# Altium PCB dd_2020-05-13_13-12-45.pcbdoc
Units mil, origin at the board's own origin, x right, y up, seen from the top; angles counter-clockwise.
Board outline 4340 x 2925 mil, 2 copper layers (Top Layer, Bottom Layer); 27 components, 65 nets, 173 pads, 61 vias.
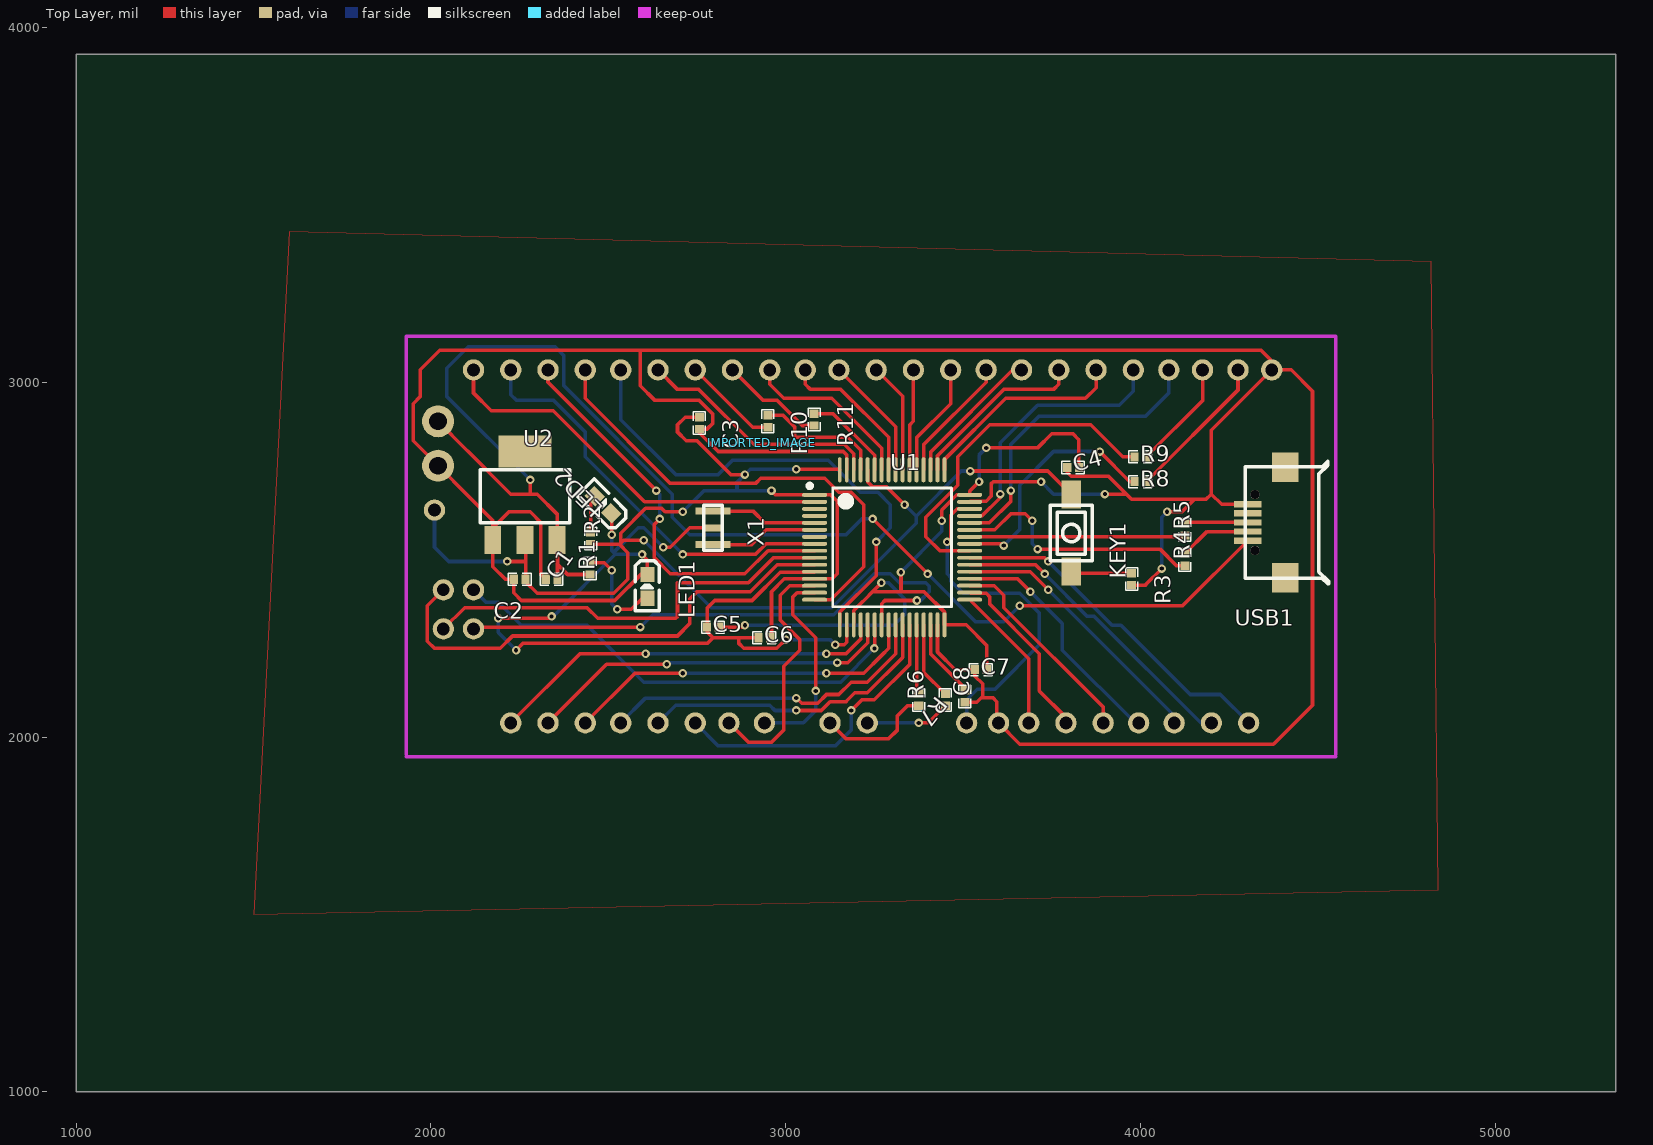
[diagram p0: Top Layer view]
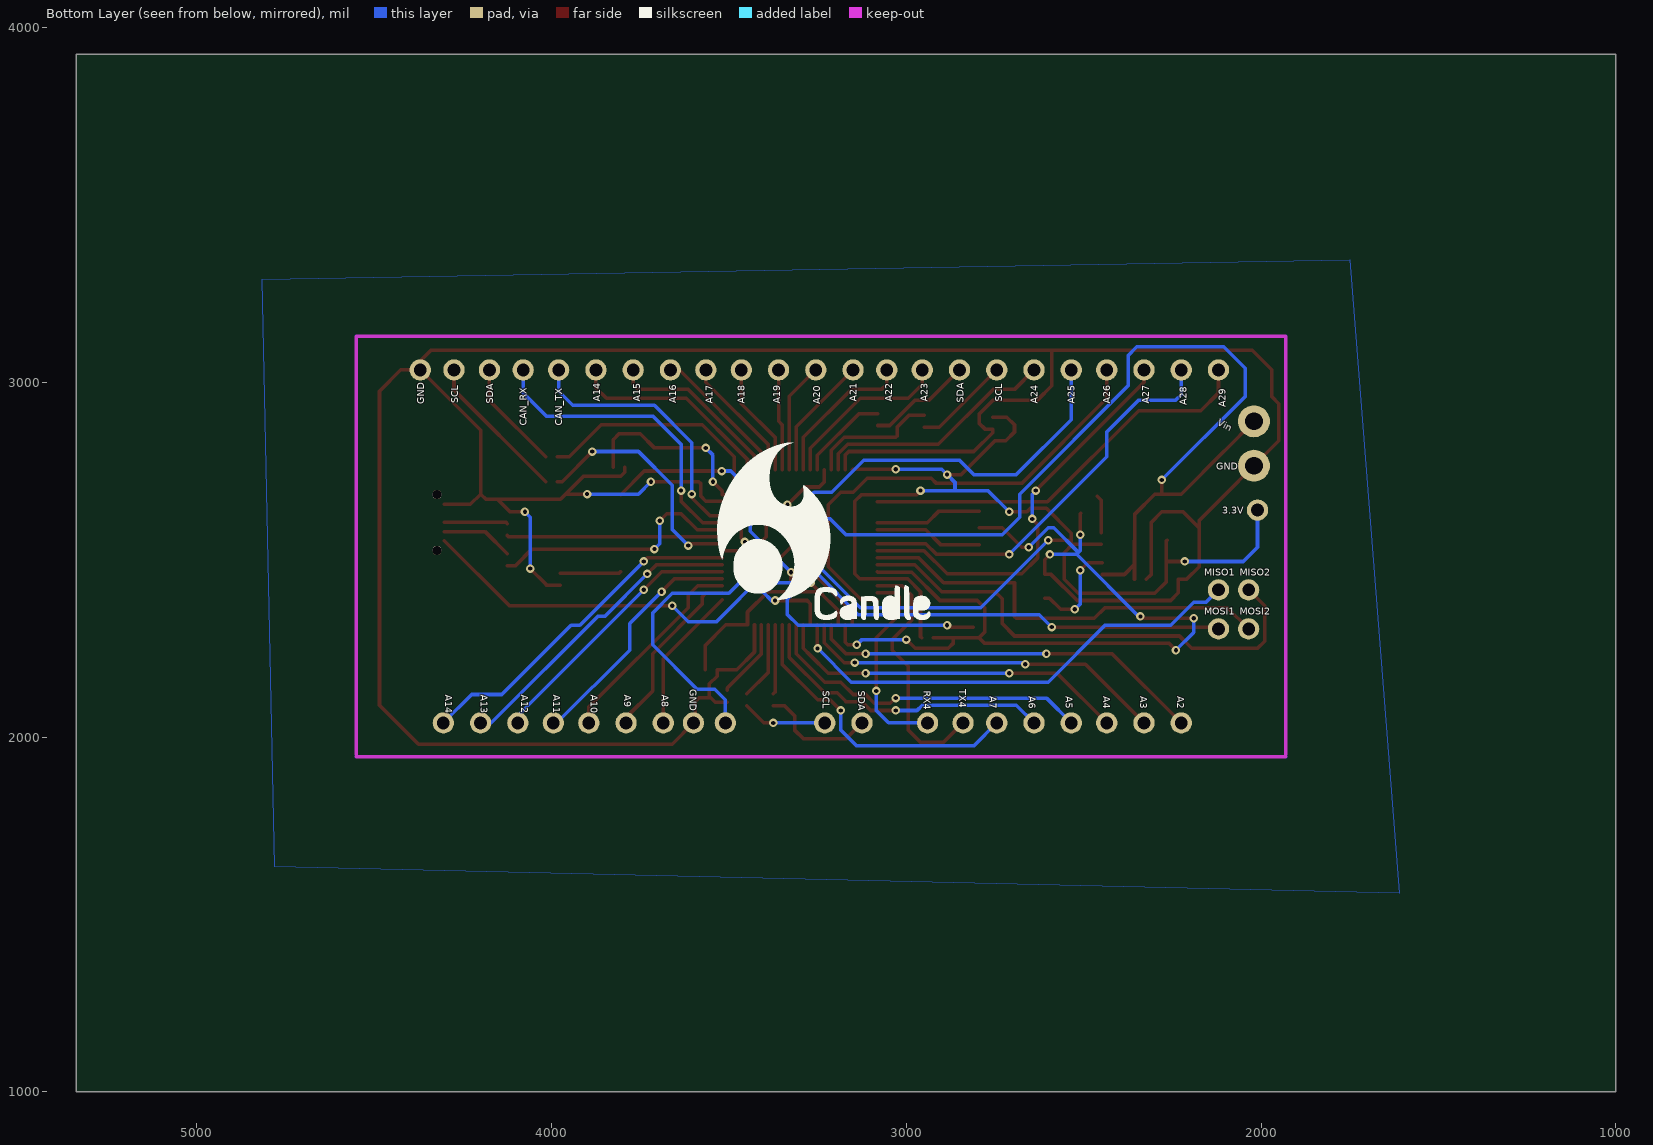
[diagram p1: Bottom Layer view, seen from below]

## Layer stack, top to bottom
Top Layer: signal copper (thickness not stored)
Dielectric: dielectric 12.6, FR-4, Dk 4.8
Bottom Layer: signal copper (thickness not stored)

## Board outline
5340,1000 1000,1000 1000,3925 5340,3925

## Components (designator, comment, footprint, x,y, rotation, side; value= is the part's Value field where it differs from the comment)
C1 "10uF" 0402 2340,2445 r0 top
C2 "10uF" 0402 2250,2445 r180 top
C3 "100nF" 0402 2756.7,2885 r270 top
C4 "100nF" 0402 3810,2760 r0 top
C5 "100nF" 0402 2795,2310 r0 top
C6 "100nF" 0402 2940,2280 r0 top
C7 "100nF" 0402 3550,2190 r0 top
C8 "4.7uF" 0402 3505,2115 r90 top
IMPORTED_IMAGE "IMPORTED_IMAGE" IMPORTED_IMAGE 2932.67,2830.16 r0 top
KEY1 "Switch3x4x2" KEY-3.0*4.0 3805,2575 r270 top
LED1 "19-213/Y2C-CQ2R2L/3T(CY)" LED-0603 2610,2425 r270 top
LED2 "19-213/Y2C-CQ2R2L/3T(CY)" LED-0603 2485,2655 r135 top
R1 "1k" 0402 2448.3,2475 r270 top
R2 "1k" 0402 2450,2560 r90 top
R3 "1k" 0402 3975,2445 r270 top
R4 "22" 0402 4125,2500 r90 top
R5 "22" 0402 4125,2585 r90 top
R6 "1k" 0402 3375,2105 r90 top
R7 "1k" 0402 3450,2105 r90 top
R8 "10k" 0402 4000,2720 r0 top
R9 "10k" 0402 4000,2790 r0 top
R10 "10k" 0402 2950,2890 r270 top
R11 "10k" 0402 3080,2895 r270 top
U1 "STM32F722RET6" LQFP-64_10X10X05P 3300,2535 r0 top
U2 "NCP1117ST33T3G" SOT-223_4PIN_L6.30-W7.30-PITCH4.60-BL 2265,2680 r0 top
USB1 "Micro USB-B 5P_C40942" MICRO-USB-12 4355,2605 r180 top
X1 "16MHz" 3213 2795,2590 r270 top

## Footprints (in the part's own frame and the unit in brackets; to place one, negate y for a bottom-side part, rotate by r counter-clockwise, add the part's x,y. Pads: shape width x height; smd on the part's side, far side on the other; paste and mask are expansions set on the pad)
0402 [mil]
  rect 23.62x25.58 smd: 1(-16.7,0) 2(16.7,0)
  silkscreen extent -32,-17 32,17
3213 [mil]
  rect 19.68x98.42 smd: 1(-47.2,0) 3(47.2,0)
  rect 19.68x63 smd: 2(0,0)
  silkscreen extent -63,-26 63,26
IMPORTED_IMAGE [mil]
KEY-3.0*4.0 [mm]
  rect 2x1.4 smd: 1(-2.752,0.001) 2(2.752,-0.001)
  silkscreen extent -2.01,-1.5 1.99,1.5
LED-0603 [mil]
  rect 43x39 smd: 1(33.5,0) 2(-33.5,0)
  silkscreen extent -72,-34 70,34
LQFP-64_10X10X05P [mil]
  oval 70.7x11.02 smd: 1(-218.5,147.64) 2(-218.5,127.95) 3(-218.5,108.27) 4(-218.5,88.58) 5(-218.5,68.9) 6(-218.5,49.21) 7(-218.5,29.53) 8(-218.5,9.84) 9(-218.5,-9.84) 10(-218.5,-29.53) 11(-218.5,-49.21) 12(-218.5,-68.9) 13(-218.5,-88.58) 14(-218.5,-108.27) 15(-218.5,-127.95) 16(-218.5,-147.64) 33(218.5,-147.64) 34(218.5,-127.95) 35(218.5,-108.27) 36(218.5,-88.58) 37(218.5,-68.9) 38(218.5,-49.21) 39(218.5,-29.53) 40(218.5,-9.84) 41(218.5,9.84) 42(218.5,29.53) 43(218.5,49.21) 44(218.5,68.9) 45(218.5,88.58) 46(218.5,108.27) 47(218.5,127.95) 48(218.5,147.64)
  oval 11.02x70.7 smd: 17(-147.64,-218.5) 18(-127.95,-218.5) 19(-108.27,-218.5) 20(-88.58,-218.5) 21(-68.9,-218.5) 22(-49.21,-218.5) 23(-29.53,-218.5) 24(-9.84,-218.5) 25(9.84,-218.5) 26(29.53,-218.5) 27(49.21,-218.5) 28(68.9,-218.5) 29(88.58,-218.5) 30(108.27,-218.5) 31(127.95,-218.5) 32(147.64,-218.5) 49(147.64,218.5) 50(127.95,218.5) 51(108.27,218.5) 52(88.58,218.5) 53(68.9,218.5) 54(49.21,218.5) 55(29.53,218.5) 56(9.84,218.5) 57(-9.84,218.5) 58(-29.53,218.5) 59(-49.21,218.5) 60(-68.9,218.5) 61(-88.58,218.5) 62(-108.27,218.5) 63(-127.95,218.5) 64(-147.64,218.5)
  silkscreen extent -238,-167 167,179
MICRO-USB-12 [mm]
  rect 1.9x2.098 smd: 0(-1.335,3.95) 0(-1.335,-3.95)
  rect 2.002x0.452 smd: 1(1.335,1.3) 2(1.335,0.65) 3(1.335,0) 4(1.335,-0.65) 5(1.335,-1.3)
  round 0.65 hole 0.65 unplated: ""(0.814,1.999) ""(0.814,-1.999)
  silkscreen extent -4.46,-4.38 1.53,4.37
SOT-223_4PIN_L6.30-W7.30-PITCH4.60-BL [mm]
  rect 1.2x2 smd: 1(-2.3,-3.175) 2(0,-3.175) 3(2.3,-3.175)
  rect 3.8x2.3 smd: 4(0,3.175)
  silkscreen extent -3.2,-1.93 3.2,1.87

## Free pads (board coordinates)
  round 60 hole 36: 6(2120,3035) 6(2640,2040) 6(2640,3035) 6(3150,3035) 6(3665,3035) 6(4095,2040) 7(2225,2040) 7(2225,3035) 7(2745,2040) 7(2745,3035) 7(3255,3035) 7(3685,2040) 7(3770,3035) 7(4200,2040) 8(2330,2040) 8(2330,3035) 8(2850,3035) 8(3125,2040) 8(3360,3035) 8(3790,2040) 8(3875,3035) 8(4305,2040) 9(2435,2040) 9(2435,3035) 9(2955,3035) 9(3230,2040) 9(3465,3035) 9(3895,2040) 9(3980,3035) 9(4175,3035) 10(2535,2040) 10(2535,3035) 10(3055,3035) 10(3565,3035) 10(3995,2040) 10(4080,3035) 10(4275,3035) 13(2035,2305) 14(2035,2415) 15(4370,3035) 16(3510,2040) 16(3600,2040) 17(2010,2640) 18(2840,2040) 19(2940,2040) ""(2120,2305) ""(2120,2415)
  round 90 hole 50: A(2020,2765) A(2020,2890)

## Via types
v1: diameter 24, hole 12, Top Layer to Bottom Layer, 61 vias

## Nets (pads, with @x,y where several pads share a name; then routed paths per layer and width w, separated by ;. In a path a pad name is that pad's centre, name@x,y a point inside that pad or via, vN(x,y) a via of type N, cw(c..) or ccw(c..) an arc to the next point about the centre after c; other vN are vias at no path point)
+5V: C1.2 pad.A@2020,2890 R1.2 U2.3 USB1.1 | length 4007.3
  Top Layer w10: pad.A@2020,2890 2100,2810 2105,2805 2225,2685 2300,2685 2355.55,2629 U2.3 2356.7,2554 C1.2 ; 2280,2685 v1(2280,2725) ; 2356.7,2486.75 2385.15,2458.3 R1.2 ; v1(3245,2615) v1(3400,2460) ; v1(3660,2370) 4118.65,2370 USB1.1
  Bottom Layer w10: v1(2280,2725) 2045,2960 2045,3040 2105,3100 2350,3100 2375,3075 2375,2990 2680,2685 2680,2620 2730,2570 3170,2570 3215,2615 v1(3245,2615) ; v1(3400,2460) 3535,2325 3615,2325 v1(3660,2370)
A1: pad.6@2120,3035 U1.2 | length 1153.7
  Top Layer w10: pad.6@2120,3035 2120,2970 2170,2920 2345,2920 2602.1,2662.9 U1.2@3081.5,2662.9
A2: pad.7@2225,3035 U1.8 | length 1166.3
  Top Layer w10: v1(2710,2515) 2915,2515 2944.84,2544.84 U1.8
  Bottom Layer w10: pad.7@2225,3035 2225,2965 2240,2950 2345,2950 2435,2860 2435,2795 2435,2790 v1(2710,2515)
A3: pad.8@2330,3035 U1.9 | length 1163.8
  Top Layer w10: pad.8@2330,3035 2330,3000 v1(2635,2695) ; v1(2645,2615) 2630,2600 2630,2505 2675,2460 2885,2460 2950.2,2525.2 U1.9
  Bottom Layer w10: v1(2635,2695) 2645,2685 v1(2645,2615)
A4: pad.9@2435,3035 U1.16 | length 1353.5
  Top Layer w10: pad.9@2435,3035 2435,2955 2675,2715 2915,2715 2930,2730 3110,2730 3150,2690 3185,2690 3220,2655 3220,2480 3127.4,2387.4 U1.16
A5: pad.10@2535,3035 U1.17 | length 1430.1
  Top Layer w10: U1.17 3152.4,2352.4 3255,2455 v1(3255,2550)
  Bottom Layer w10: pad.10@2535,3035 2535,2895 2690,2740 2810,2740 2850,2780 3120,2780 3210,2690 3260,2690 3295,2655 3295,2590 v1(3255,2550)
A6: pad.7@2225,2040 U1.20 | length 1124.4
  Top Layer w10: pad.7@2225,2040 2420,2235 v1(2605,2235) ; v1(3115,2235) 3170,2235 3211.42,2276.42 U1.20
  Bottom Layer w10: v1(2605,2235) v1(3115,2235)
A7: pad.8@2330,2040 U1.21 | length 1045.2
  Top Layer w10: pad.8@2330,2040 2495,2205 v1(2665,2205) ; v1(3145,2210) 3175.1,2210 3231.1,2266 U1.21
  Bottom Layer w10: v1(2665,2205) 2670,2210 v1(3145,2210)
A8: pad.9@2435,2040 U1.24 | length 1008.6
  Top Layer w10: pad.9@2435,2040 2575,2180 v1(2710,2180) ; v1(3115,2180) 3220,2180 3270,2230 3290.16,2250.16 U1.24
  Bottom Layer w10: v1(2710,2180) v1(3115,2180)
A9: pad.10@2535,2040 U1.25 | length 949.6
  Top Layer w10: v1(3030,2110) 3045,2095 3090,2095 3115,2120 3150,2120 3185,2155 3230,2155 3309.8,2234.8 U1.25
  Bottom Layer w10: pad.10@2535,2040 2605,2110 v1(3030,2110)
A10: pad.6@2640,2040 U1.26 | length 870.4
  Top Layer w10: v1(3030,2075) 3100,2075 3125,2100 3170,2100 3175,2105 3195,2125 3230,2125 3329.53,2224.53 U1.26
  Bottom Layer w10: pad.6@2640,2040 2690,2090 2955,2090 2970,2075 v1(3030,2075)
A11: pad.7@2745,2040 U1.27 | length 870.6
  Top Layer w10: v1(3185,2075) 3215,2105 3250,2105 3349.21,2204.21 U1.27
  Bottom Layer w10: pad.7@2745,2040 2810,1975 3140,1975 3185,2020 v1(3185,2075)
A12: pad.7@3685,2040 U1.33 | length 416.3
  Top Layer w10: U1.33 3685,2220.86 pad.7@3685,2040
A13: pad.8@3790,2040 U1.34 | length 505.5
  Top Layer w10: U1.34 3520.55,2405 3565,2405 3575,2395 3575,2375 3715,2235 3715,2130 3790,2055 pad.8@3790,2040
A14: pad.9@3895,2040 U1.35 | length 583.6
  Top Layer w10: U1.35 3588.27,2426.73 3615,2400 3615,2365 3895,2085 pad.9@3895,2040
A15: pad.10@3995,2040 U1.36 | length 688.8
  Top Layer w10: U1.36 3653.58,2446.42 v1(3690,2410)
  Bottom Layer w10: v1(3690,2410) 3780,2320 3780,2245 3985,2040 pad.10@3995,2040
A16: pad.6@4095,2040 U1.37 | length 764.7
  Top Layer w10: U1.37 3688.9,2466.1 v1(3740,2415)
  Bottom Layer w10: v1(3740,2415) 4095,2060 pad.6@4095,2040
A17: pad.7@4200,2040 U1.38 | length 866.2
  Top Layer w10: U1.38 3704.21,2485.79 v1(3730,2460)
  Bottom Layer w10: v1(3730,2460) 3850,2340 3870,2340 4170,2040 pad.7@4200,2040
A18: pad.8@4305,2040 U1.39 | length 979.3
  Top Layer w10: U1.39 3729.53,2505.47 v1(3740,2495)
  Bottom Layer w10: v1(3740,2495) 3920,2315 3945,2315 4140,2120 4225,2120 pad.8@4305,2040
A19: pad.8@3875,3035 U1.49 | length 590.3
  Top Layer w10: U1.49 3447.64,2782.64 3620,2955 3845,2955 3875,2985 pad.8@3875,3035
A20: pad.7@3770,3035 U1.50 | length 505.2
  Top Layer w10: U1.50@3427.9,2753.5 3427.9,2792.9 3615,2980 3755,2980 3770,2995 pad.7@3770,3035
A21: pad.6@3665,3035 U1.51 | length 402.5
  Top Layer w10: U1.51 3408.27,2803.27 3640,3035 pad.6@3665,3035
A22: pad.10@3565,3035 U1.52 | length 354.6
  Top Layer w10: U1.52 3388.58,2823.58 3565,3000 pad.10@3565,3035
A23: pad.9@3465,3035 U1.53 | length 321.3
  Top Layer w10: U1.53 3368.9,2843.9 3465,2940 pad.9@3465,3035
A24: pad.8@3360,3035 U1.54 | length 286
  Top Layer w10: U1.54 3349.2,2879.2 3360,2890 pad.8@3360,3035
A25: pad.7@3255,3035 U1.55 | length 312.4
  Top Layer w10: pad.7@3255,3035 3329.53,2960.47 U1.55
A26: pad.6@3150,3035 U1.56 | length 347.7
  Top Layer w10: pad.6@3150,3035 3309.84,2875.16 U1.56
A27: pad.10@3055,3035 U1.57 | length 428.7
  Top Layer w10: pad.10@3055,3035 3055,2995 3070,2980 3155,2980 3290.16,2844.84 U1.57
A28: pad.9@2955,3035 U1.58 | length 491.3
  Top Layer w10: pad.9@2955,3035 2955,2995 2995,2955 3130,2955 3270.5,2814.5 U1.58
A29: pad.6@2640,3035 U1.62 | length 694.5
  Top Layer w10: pad.6@2640,3035 2695,2980 2755,2980 2910,2825 3165,2825 3191.7,2798.3 U1.62
CAN_RX: pad.10@4080,3035 U1.44 | length 871.9
  Top Layer w10: U1.44 3573.9,2603.9 3635,2665 v1(3635,2695)
  Bottom Layer w10: v1(3635,2695) 3635,2825 3715,2905 4015,2905 4080,2970 pad.10@4080,3035
CAN_TX: pad.9@3980,3035 U1.45 | length 757.9
  Top Layer w10: U1.45 3553.58,2623.58 3605,2675 v1(3605,2685)
  Bottom Layer w10: v1(3605,2685) 3605,2830 3710,2935 3940,2935 3980,2975 pad.9@3980,3035
GND: C1.1 C2.2 C3.2 C4.1 C5.1 C6.1 C7.1 C8.1 LED1.2 LED2.2 pad.15 pad.16@3600,2040 pad.A@2020,2765 R3.2 U1.12 U1.18 U1.31 U1.47 U1.63 U2.1 USB1.5 X1.2 | length 11856.2
  Top Layer w10: U2.1 2174.4,2610.5 1950,2835 1950,2940 1970,2960 1970,3035 2025,3090 4340,3090 4370,3060 pad.15 ; v1(2190,2335) 2335,2335 v1(2340,2340) ; v1(2240,2245) 2260,2265 2780,2265 2795,2280 ; C1.1 2310,2458.3 2310,2605 2280,2635 2220,2635 2174.45,2589.45 U2.1 2174.45,2480.55 2210,2445 C2.2 2233.3,2406.7 2255,2385 2518.54,2385 2592.04,2458.5 LED1.2 2610,2500 v1(2595,2515) ; LED2.2 2510,2630 v1(2510,2570) ; 2590,3090 2590,2995 2590,2990 2630,2950 2755,2950 2795,2910 2795,2885 2778.3,2868.3 C3.2 2756.7,2858.3 2810,2805 3162.27,2805 3172.05,2795.22 U1.63 ; v1(2655,2535) 2675,2535 2730,2590 X1.2 ; 2867.09,2280 2867.09,2265 2882.09,2250 2975,2250 v1(3000,2275) ; C6.1 2795,2280 ; U1.12 3080.4,2465 2985,2465 2905,2385 2800,2385 2778.3,2363.3 C5.1 2778.3,2296.7 2795,2280 ; v1(3140,2260) 3165,2260 3172.05,2267.05 U1.18@3172.05,2316.5 ; U1.31 3427.95,2240 3477.95,2190 C7.1 3533.3,2171.7 3555,2150 3555,2115 3538.3,2098.3 C8.1 ; U1.47 3520.55,2665 3565,2665 3580,2680 3580,2715 3585,2720 v1(3720,2720) ; 3555,2110.5 3584.5,2110.5 3595,2100 3595,2045 3600,2040 3660,1980 4375,1980 4485,2090 4485,2975 4425,3035 pad.15 ; C4.1 3793.3,2746.7 3805,2735 3910,2735 3975,2670 4185,2670 4200,2685 ; v1(3900,2685) 3952.71,2685 3960,2685 ; R3.2 4015,2428.3 4015,2430 v1(4060,2475) ; v1(4075,2635) 4117.24,2635 4152.24,2670 ; USB1.5 4228.8,2656.2 4200,2685 ; 4200,2685 4200,2865 pad.15
  Bottom Layer w10: v1(2190,2335) 2190,2295 v1(2240,2245) ; v1(2340,2340) 2345,2340 2520,2515 ; v1(2510,2570) 2510,2525 2520,2515 ; 2514.7,2520.3 2584.5,2590 2600,2590 v1(2655,2535) ; v1(2595,2515) 2520,2515 ; v1(3000,2275) 3125,2275 v1(3140,2260) ; v1(3720,2720) 3755,2685 v1(3900,2685) ; v1(4060,2475) 4060,2620 v1(4075,2635)
KEY1_2: KEY1.2 R3.1 | length 172.1
  Top Layer w10: KEY1.2 3809.92,2461.7 R3.1
LED1_1: LED1.1 R1.1 | length 284.9
  Top Layer w10: R1.1 2488.3,2491.7 v1(2510,2470) ; v1(2525,2360) 2565,2360 2596.5,2391.5 LED1.1
  Bottom Layer w10: v1(2510,2470) 2510,2375 v1(2525,2360)
LED2_1: LED2.1 R2.2 | length 106.7
  Top Layer w10: R2.2 2450,2667.38 LED2.1
null: 
OSC_IN: U1.5 X1.1 | length 300.3
  Top Layer w10: X1.1 2907.8,2637.2 2941.1,2603.9 U1.5
OSC_OUT: U1.6 X1.3 | length 303.7
  Top Layer w10: X1.3 2903.59,2542.8 2945,2584.21 U1.6
RX4: pad.19 U1.15 | length 572.9
  Top Layer w10: U1.15@3081.5,2407.05 3032.05,2407.05 3020,2395 3020,2345 3085,2280 v1(3085,2130)
  Bottom Layer w10: pad.19 3050,2040 3085,2075 v1(3085,2130)
SCL: pad.7@2745,3035 pad.9@3230,2040 pad.10@4275,3035 R7.1 R8.2 R10.2 | length 934
  Top Layer w10: pad.7@2745,3035 2906.7,2873.3 R10.2 ; v1(3375,2040) 3401.7,2040 R7.1 ; R8.2 4275,2978.3 pad.10@4275,3035
  Bottom Layer w10: pad.9@3230,2040 v1(3375,2040)
SDA: pad.8@2850,3035 pad.8@3125,2040 pad.9@4175,3035 R6.1 R9.2 R11.2 | length 936.2
  Top Layer w10: pad.8@2850,3035 2935,2950 2975,2950 3046.7,2878.3 R11.2 ; pad.8@3125,2040 3170,1995 3290,1995 3315,2020 3315,2060 3343.3,2088.3 R6.1 ; R9.2 4175,2948.3 pad.9@4175,3035
SPI1_MISO: pad.@2120,2415 U1.22 | length 1343.9
  Top Layer w10: v1(3250,2250) 3250.79,2250.79 U1.22
  Bottom Layer w10: pad.@2120,2415 2155,2380 2190,2380 2255,2315 2440,2315 2600,2155 3155,2155 v1(3250,2250)
SPI1_MOSI: pad.@2120,2305 U1.23 | length 1586.5
  Top Layer w10: pad.@2120,2305 2125,2310 v1(2590,2310) ; U1.23 3270.47,2365 3270.47,2375.47 3280,2385 v1(3370,2385)
  Bottom Layer w10: v1(2590,2310) 2625,2345 3135,2345 3250,2460 3295,2460 3320,2435 3395,2435 3405,2425 3405,2410 3380,2385 v1(3370,2385)
SPI2_MISO: pad.13 U1.10 | length 1210.1
  Top Layer w10: pad.13 2095,2365 2440,2365 2470,2335 2690,2335 2695,2340 2695,2435 2895,2435 2965.5,2505.5 U1.10
SPI2_MOSI: pad.14 U1.11 | length 1402.1
  Top Layer w10: pad.14 1990,2370 1990,2270 2010,2250 2195,2250 2230,2285 2695,2285 2730,2320 2730,2390 2750,2410 2900,2410 2975.8,2485.8 U1.11
SWDIO: pad.16@3510,2040 U1.46 | length 965.8
  Top Layer w10: v1(3455,2550) 3465,2560 3465,2625 3483.27,2643.27 U1.46
  Bottom Layer w10: v1(3455,2550) 3455,2460 3465,2450 3465,2440 3500,2405 3660,2405 3715,2350 3715,2260 3590,2135 3540,2135 3510,2105 pad.16@3510,2040
TX4: pad.18 U1.14 | length 721.3
  Top Layer w10: pad.18 2895,1985 2960,1985 2995,2020 2995,2200 3040,2245 3040,2275 2985,2330 2985,2400 3011.7,2426.7 U1.14
U1_3: U1.3
U1_4: U1.4
U1_7: U1.7
U1_28: R6.2 U1.28 | length 197.3
  Top Layer w10: U1.28 3368.9,2127.8 R6.2
U1_29: R7.2 U1.29 | length 220.2
  Top Layer w10: U1.29 3388.58,2183.12 R7.2
U1_30: C8.2 U1.30 | length 224.9
  Top Layer w10: U1.30 3408.27,2235 3505,2138.27 C8.2
U1_40: R9.1 U1.40 | length 975.1
  Top Layer w10: U1.40 3434.8,2525.2 3395,2565 3395,2620 3485,2710 3485,2790 3575,2880 3860,2880 3950,2790 R9.1
U1_41: R8.1 U1.41 | length 685.1
  Top Layer w10: U1.41 3610,2545 v1(3615,2540) ; v1(3885,2805) 3970,2720 R8.1
  Bottom Layer w10: v1(3615,2540) 3660,2585 3660,2710 3755,2805 v1(3885,2805)
U1_42: R5.1 U1.42 | length 607.9
  Top Layer w10: U1.42 4121.7,2565 R5.1
U1_43: R4.1 U1.43 | length 724.3
  Top Layer w10: U1.43 3589.2,2584.2 3635,2630 3675,2630 v1(3695,2610) ; v1(3710,2530) 4055,2530 4101.7,2483.3 R4.1
  Bottom Layer w10: v1(3695,2610) 3695,2545 v1(3710,2530)
U1_59: R11.1 U1.59 | length 260.2
  Top Layer w10: R11.1 3133.3,2911.7 3250.79,2794.21 U1.59
U1_61: R10.1 U1.61 | length 371.8
  Top Layer w10: R10.1 2993.3,2906.7 3025,2875 3025,2850 3030,2845 3175,2845 3211.4,2808.6 U1.61
U2_4: U2.4
USART1_RX: R4.2 USB1.2 | length 203.4
  Top Layer w10: R4.2 4187.7,2579.4 USB1.2
USART1_TX: R5.2 USB1.3 | length 178.9
  Top Layer w10: R5.2 4128.3,2605 USB1.3@4302.5,2605
USB1_4: USB1.4
VDD: C2.1 C3.1 C4.2 C5.2 C6.2 C7.2 KEY1.1 pad.17 R2.1 U1.1 U1.13 U1.19 U1.32 U1.48 U1.60 U1.64 U2.2 | length 6884.6
  Top Layer w10: v1(2215,2495) 2265.11,2495 2266.7,2493.41 ; U2.2 2266.7,2553.3 2266.7,2438.3 2300,2405 2515,2405 2555,2445 2555,2520 2531.7,2543.3 ; R2.1 2531.7,2543.3 ; 2535,2545 2535,2575 2605,2645 2650,2645 2660,2635 v1(2710,2635) ; v1(2600,2555) 2543.4,2555 2531.7,2543.3 ; C3.1 2716.7,2901.7 2695,2880 2695,2860 2720,2835 2750,2835 2845,2740 v1(2885,2740) ; C5.2 2880,2310 v1(2885,2315) ; C6.2 2960,2283.3 2960,2410 2996.4,2446.4 3131.4,2446.4 3145,2460 3145,2665 3127.4,2682.6 2972.4,2682.6 v1(2960,2695) ; v1(3030,2755) 3150.86,2755 U1.64 ; U1.19 3191.7,2356.7 3245,2410 3390,2410 3447.6,2352.4 U1.32 ; U1.60 3231.1,2718.9 3245,2705 3285,2705 v1(3335,2655) v1@3330,2660 ; 3235.5,2400.5 3235,2400 v1(3270,2435) ; 3325,2410 v1(3325,2465) ; v1(3440,2610) 3440,2640 3482.64,2682.64 U1.48 3518.5,2693.5 v1(3545,2720) ; U1.32 3508.5,2316.5 3566.7,2258.3 C7.2 ; v1(3520,2750) 3738.38,2750 KEY1.1 ; v1(3565,2815) 3710,2815 3750,2855 3810,2855 3825,2840 3826.7,2836.7 C4.2
  Bottom Layer w10: pad.17 2010,2535 2050,2495 v1(2215,2495) ; v1(2600,2555) 2790,2365 3130,2365 3367.9,2602.9 3367.9,2622.9 ; v1(2710,2635) 2770,2695 v1(2960,2695) ; 2862.7,2695 2862.7,2717.7 v1(2885,2740) 2900,2755 v1(3030,2755) ; v1(2885,2315) 3305,2315 3335,2345 3335,2390 3290,2435 v1(3270,2435) ; v1(3325,2465) 3440,2580 v1(3440,2610) ; v1(3335,2655) 3335.72,2655 3367.86,2622.86 3495,2750 v1(3520,2750) ; v1(3545,2720) 3545,2795 v1(3565,2815)
pads on no net: USB1. USB1.0

## Polygon pours and split planes (outlines as drawn)
GND on Bottom Layer (solid): 4815,3290 1750,3345 1610,1560 4780,1635
GND on Top Layer (solid): 4820,3340 1600,3425 1500,1500 4840,1570

## Silkscreen, mask and mechanical layers (free items; w line width, h text height)
Bottom Overlay:
  text "SCL" at 2730,2945 h20 r270
  text "A23" at 2940,2945 h20 r270
  text "A22" at 3040,2945 h20 r270
  text "A21" at 3140,2945 h20 r270
  text "A15" at 3750,2945 h20 r270
  text "A14" at 3863.18,2945.27 h20 r270
  text "SDA" at 2838.18,2943 h20 r270
  text "A16" at 3648.18,2941.18 h20 r270
  text "SCL" at 4263.18,2940.73 h20 r270
  text "A27" at 2315,2940 h20 r270
  text "A26" at 2425,2940 h20 r270
  text "A25" at 2525,2940 h20 r270
  text "A24" at 2630,2940 h20 r270
  text "A19" at 3355,2940 h20 r270
  text "A18" at 3455,2940 h20 r270
  text "A17" at 3545,2940 h20 r270
  text "SDA" at 4165,2940 h20 r270
  text "GND" at 4358.18,2938.91 h20 r270
  text "A20" at 3243.18,2938 h20 r270
  text "A28" at 2210,2935 h20 r270
  text "A29" at 2100,2930 h20 r270
  text "Vin" at 2124.54,2881.09 h20 r27
  text "CAN_TX" at 3969.55,2877.27 h20 r270
  text "CAN_RX" at 4069.55,2877.27 h20 r270
  text "GND" at 2126.09,2754.09 h20
  text "3.3V" at 2109.82,2629.09 h20
  text "MISO2" at 2060,2455 h20
  text "MISO1" at 2159.82,2454.09 h20
  text "MOSI2" at 2060,2345 h20
  text "MOSI1" at 2160,2345 h20
  text "TX4" at 2850.91,2135 h20 r90
  text "GND" at 3610.91,2135 h20 r90
  text "RX4" at 2950.91,2130 h20 r90
  text "SDA" at 3135,2130 h20 r90
  text "SCL" at 3235,2130 h20 r90
  text "A8" at 3690,2120 h20 r90
  text "A9" at 3795,2120 h20 r90
  text "A10" at 3890,2120 h20 r90
  text "A11" at 3995,2120 h20 r90
  text "A12" at 4085,2120 h20 r90
  text "A13" at 4200,2120 h20 r90
  text "A14" at 4300,2120 h20 r90
  text "A2" at 2235.91,2115 h20 r90
  text "A3" at 2340.91,2115 h20 r90
  text "A4" at 2445,2115 h20 r90
  text "A5" at 2550,2115 h20 r90
  text "A6" at 2655,2115 h20 r90
  text "A7" at 2765,2115 h20 r90
Document:
  lines w0.1: 3169,2461.5 3171,2463.5